# Altium PCB Frequency_Sweeper.PcbDoc
Units mil, origin at the board's own origin, x right, y up, seen from the top; angles counter-clockwise.
Board outline 2720 x 3267.72 mil, 2 copper layers (Top Layer, Bottom Layer); 47 components, 36 nets, 187 pads, 43 vias.
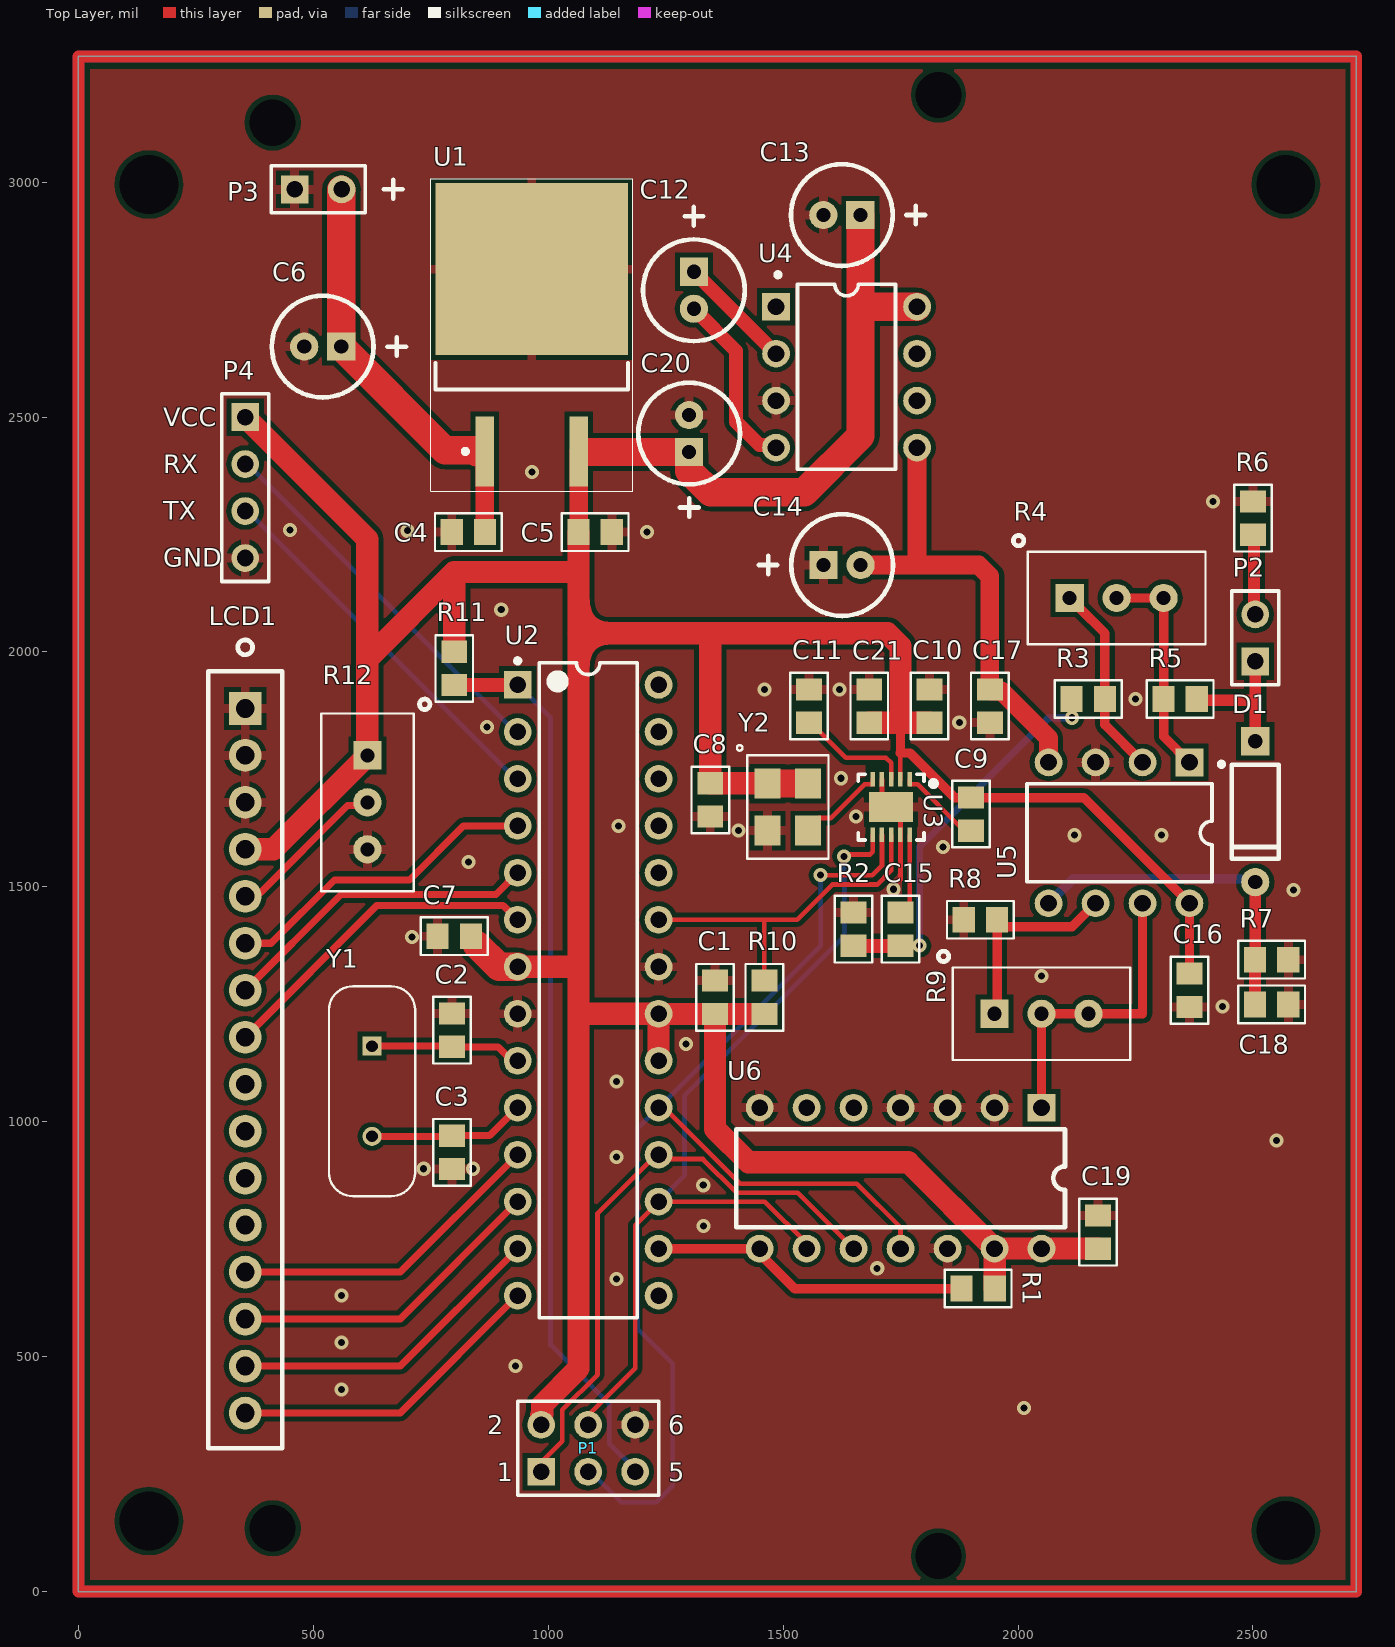
[diagram p0: Top Layer view]
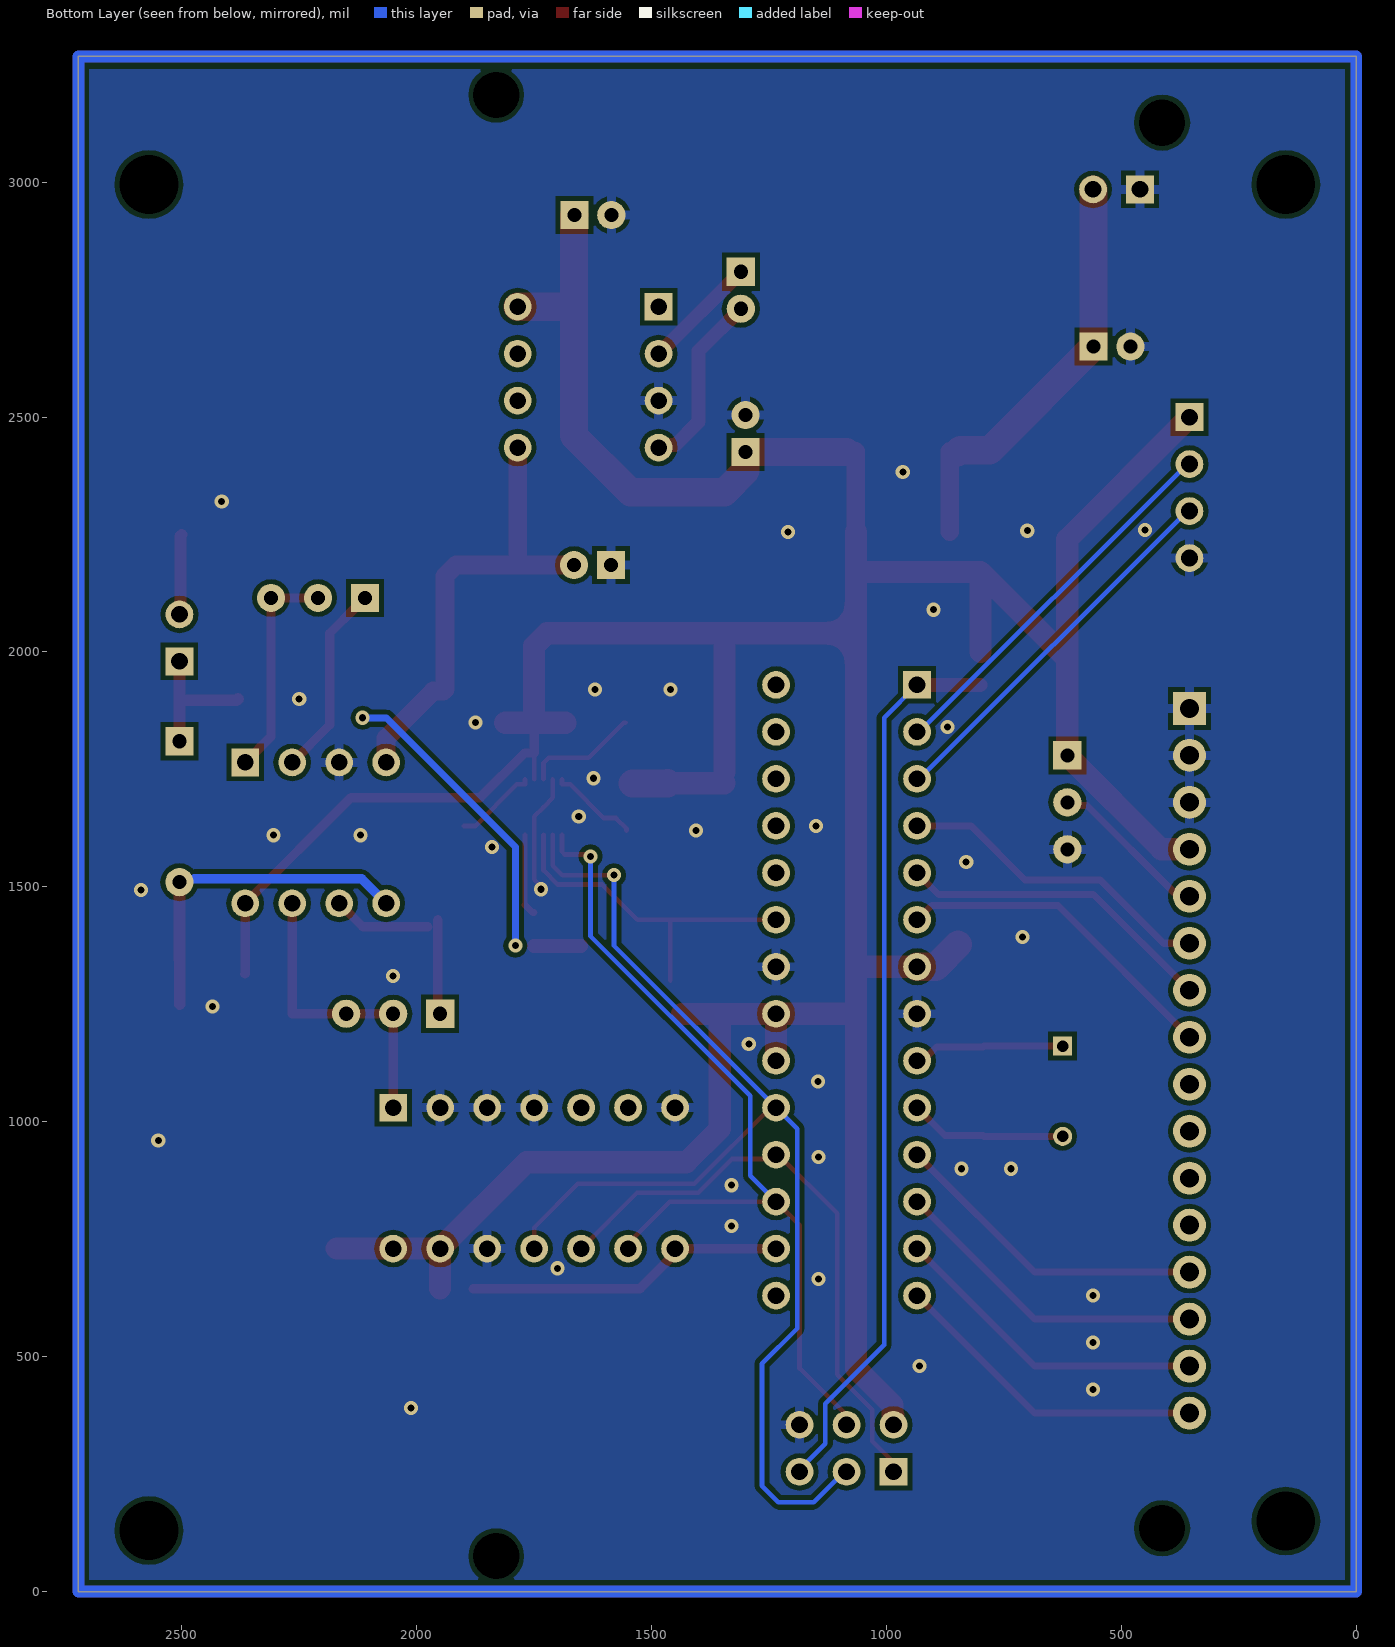
[diagram p1: Bottom Layer view, seen from below]
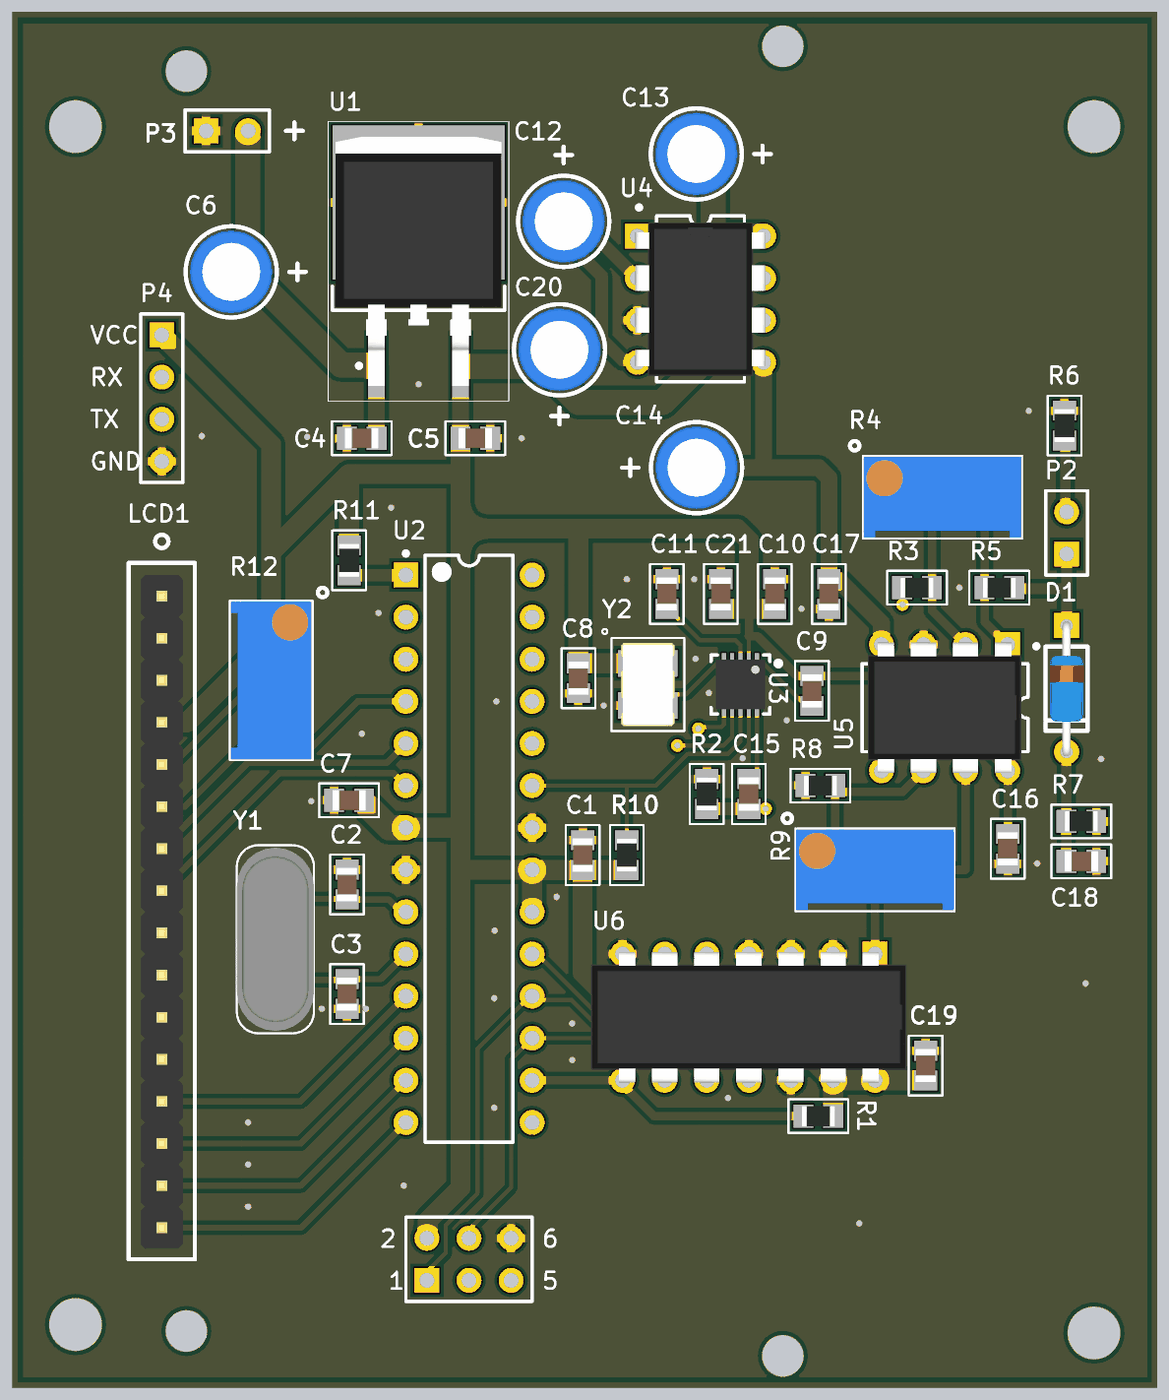
[diagram p2: 3D render of the assembled board from above, using the file's embedded part models]

## Layer stack, top to bottom
Top Solder: solder mask 0.4, Solder Resist, Dk 3.5
Top Layer: signal copper 1.4
Dielectric 1: dielectric 12.6, FR-4, Dk 4.8
Bottom Layer: signal copper 1.4
Bottom Solder: solder mask 0.4, Solder Resist, Dk 3.5

## Board outline
0,0 0,3267.72 2720,3267.72 2720,0

## Design rules (kind name [scope] priority, off if disabled: settings)
Clearance [All] p1: gap=10 ignorepadtopadclearanceinfootprint=TRUE except(0: Arc-Hole Track-Hole SMDPad-Hole THPad-Hole Via-Hole Fill-Hole Poly-Hole Region-Hole Text-Hole; 9: Arc-Arc Arc-Track Arc-SMDPad Track-Track Track-SMDPad)
PlaneConnect [All] p1: pad.planeconnectstyle=Relief pad.reliefexpansion=20 pad.reliefentries=4 pad.reliefconductorwidth=10 pad.reliefairgap=10 via.planeconnectstyle=Direct via.reliefexpansion=20 via.reliefentries=4 via.reliefconductorwidth=10 via.reliefairgap=10
PolygonConnect [All] p1: thpad.connectstyle=Relief thpad.reliefconductorwidth=20 thpad.reliefentries=4 thpad.polygonreliefangle="90 Angle" thpad.airgapwidth=10 smdpad.connectstyle=Relief smdpad.reliefconductorwidth=20 smdpad.reliefentries=4 smdpad.polygonreliefangle="90 Angle" smdpad.airgapwidth=10 via.connectstyle=Direct via.reliefconductorwidth=10 via.reliefentries=4 via.polygonreliefangle="90 Angle" via.airgapwidth=10
RoutingVias [All] p1: holewidth=28 width=50 viastyle="Through Hole" minholewidth=10 minwidth=25 maxholewidth=28 maxwidth=50
SolderMaskExpansion [All] p1: expansion=4 istentingtop=FALSE
Width [All] p1: maxlimit=60 minlimit=10 preferedwidth=15
29 further rules are at their usual default settings.

## Components (designator, comment, footprint, x,y, rotation, side; value= is the part's Value field where it differs from the comment)
C1 "Cap" C0805 1355,1265 r270 top value=0.1uF
C2 "Cap" C0805 795,1195 r270 top value=20pF
C3 "Cap" C0805 795,935 r90 top value=20pF
C4 "Cap" C0805 830,2255 r0 top value=0.33uF
C5 "Cap" C0805 1100,2255 r180 top value=1uF
C6 "Cap Pol1" CAP-D5 520,2650 r180 top value=10uF
C7 "Cap" C0805 800,1395 r0 top value=1uF
C8 "Cap" C0805 1345,1685 r90 top value=0.1uF
C9 "Cap" C0805 1900,1655 r270 top value=10nF
C10 "Cap" C0805 1811.67,1885 r270 top value=0.1uF
C11 "Cap" C0805 1555,1885 r270 top value=0.1uF
C12 "Cap Pol1" CAP-D5 1310,2770 r270 top value=10uF
C13 "Cap Pol1" CAP-D5 1625,2930 r180 top value=10uF
C14 "Cap Pol1" CAP-D5 1625.63,2185 r0 top value=10uF
C15 "Cap" C0805 1750,1410 r90 top value=0.1uF
C16 "Cap" C0805 2365,1280 r90 top value=0.1uF
C17 "Cap" C0805 1940,1885 r270 top value=0.1uF
C18 "Cap" C0805 2540,1250 r180 top value=1uF
C19 "Cap" C0805 2170,765 r270 top value=1uF
C20 "Cap Pol1" CAP-D5 1300,2465 r90 top value=10uF
C21 "Cap" C0805 1683.33,1885 r270 top value=10uF
D1 "1N4148" DIODE-AXIAL-7.62 2505,1810 r270 top
LCD1 "16-Pin LCD Display With Backlight" HEADER-16X1 355,1880 r270 top
P1 "Header 6" HDR2X3 985,255 r0 top
P2 "Header 2" HDR1X2 2505,1980 r90 top
P3 "Header 2" HDR1X2 460.31,2984.69 r0 top
P4 "Header 4" HDR1X4 355,2500 r270 top
R1 "Res1" R0805 1915,645 r0 top value=10K
R2 "Res1" R0805 1650,1410 r270 top value=1K
R3 "Res1" R0805 2149.57,1900 r0 top value=1K
R4 "RPot" TRIMMER-2.54MM 2210,2115 r0 top value=20K
R5 "Res1" R0805 2345,1900 r180 top value=1K
R6 "Res1" R0805 2500,2285 r270 top value=100
R7 "Res1" R0805 2540,1345 r180 top value=100K
R8 "Res1" R0805 1920,1430 r0 top value=1K
R9 "RPot" TRIMMER-2.54MM 2050,1230 r0 top value=20K
R10 "Res1" R0805 1460,1265 r270 top value=10K
R11 "Res1" R0805 800,1965 r90 top value=10K
R12 "RPot" TRIMMER-2.54MM 615,1680 r270 top value=10K
U1 "7805" TO-263_N 965,2675 r90 top
U2 "ATmega168-20PU" 28P3 1085,1280 r0 top
U3 "AD9837" LFCSP-10 1730,1670 r270 top
U4 "LMC7660" DIP-8 1635,2585 r0 top
U5 "TL072P" DIP-8 2215,1615 r270 top
U6 "MCP3004" DIP-14 1750,880 r270 top
Y1 "16MHz" HC-49-THT 625,1065 r270 top
Y2 "LFSPXO051652" LFSPXO051652 1510,1670 r270 top

## Footprints (in the part's own frame and the unit in brackets; to place one, negate y for a bottom-side part, rotate by r counter-clockwise, add the part's x,y. Pads: shape width x height; smd on the part's side, far side on the other; paste and mask are expansions set on the pad)
28P3 [mm] "28-Pin Plastic Dual In-Line Package (PDIP)"
  rect 1.5x1.5 hole 0.9: 1(-3.81,16.51)
  round 1.5 hole 0.9: 2(-3.81,13.97) 3(-3.81,11.43) 4(-3.81,8.89) 5(-3.81,6.35) 6(-3.81,3.81) 7(-3.81,1.27) 8(-3.81,-1.27) 9(-3.81,-3.81) 10(-3.81,-6.35) 11(-3.81,-8.89) 12(-3.81,-11.43) 13(-3.81,-13.97) 14(-3.81,-16.51) 15(3.81,-16.51) 16(3.81,-13.97) 17(3.81,-11.43) 18(3.81,-8.89) 19(3.81,-6.35) 20(3.81,-3.81) 21(3.81,-1.27) 22(3.81,1.27) 23(3.81,3.81) 24(3.81,6.35) 25(3.81,8.89) 26(3.81,11.43) 27(3.81,13.97) 28(3.81,16.51)
  silkscreen extent -3.93,-17.7 2.65,17.93, body extent -3.6,-17.65 3.6,17.65, height 4.58
C0805 [mm] "Chip Resistor, Body 2.0x1.2mm, IPC Medium Density"
  rect 1.2x1.4 smd: 1(-0.9,0) 2(0.9,0)
  silkscreen extent -1.8,-1.02 1.8,1.02, body extent -1,-0.62 1,0.62, height 1.25
CAP-D5 [mil]
  rect 60x60 hole 30: 1(-39.37,0)
  round 60 hole 30: 2(39.37,0)
  silkscreen extent -177,-108 108,108, body extent -98,-98 98,98, height 276
DIODE-AXIAL-7.62 [mil]
  rect 60x60 hole 30: 1(0,0)
  round 60 hole 30: 2(300,0)
  silkscreen extent 50,-50 250,50, body extent -10,-40 310,40, height 99
DIP-8 [mm] "DIP; 8 Leads; Row Spacing 7.62 mm; Pitch 2.54 mm"
  rect 1.5x1.5 hole 0.9: 1(-3.81,3.81)
  round 1.5 hole 0.9: 2(-3.81,1.27) 3(-3.81,-1.27) 4(-3.81,-3.81) 5(3.81,-3.81) 6(3.81,-1.27) 7(3.81,1.27) 8(3.81,3.81)
  silkscreen extent -3.83,-4.98 2.65,5.66, body extent -3.94,-4.63 3.94,4.64, height 3.68
DIP-14 [mm]
  rect 1.5x1.5 hole 0.9: 1(-3.81,7.62)
  round 1.5 hole 0.9: 2(-3.81,5.08) 3(-3.81,2.54) 4(-3.81,0) 5(-3.81,-2.54) 6(-3.81,-5.08) 7(-3.81,-7.62) 8(3.81,-7.62) 9(3.81,-5.08) 10(3.81,-2.54) 11(3.81,0) 12(3.81,2.54) 13(3.81,5.08) 14(3.81,7.62)
  silkscreen extent -2.65,-8.89 2.65,8.89, body extent -3.94,-9.52 3.94,9.53, height 3.68
HC-49-THT [mm]
  rect 1.03x1.03 hole 0.63: 1(-2.44,0)
  round 1.03 hole 0.63: 2(2.44,0)
  silkscreen extent -5.68,-2.33 5.68,2.33, body extent -5.52,-2.32 5.53,2.33, height 4.1
HDR1X2 [mm] "Connector; Header; 2 Position"
  rect 1.5x1.5 hole 0.9: 1(0,0)
  round 1.5 hole 0.9: 2(2.54,0)
  silkscreen extent -1.27,-1.27 3.81,1.27
HDR1X4 [mm] "Connector; Header; 4 Position"
  rect 1.5x1.5 hole 0.9: 1(0,0)
  round 1.5 hole 0.9: 2(2.54,0) 3(5.08,0) 4(7.62,0)
  silkscreen extent -1.27,-1.27 8.89,1.27
HDR2X3 [mm] "Connector; Header; 3x2 Position"
  rect 1.5x1.5 hole 0.9: 1(0,0)
  round 1.5 hole 0.9: 2(0,2.54) 3(2.54,0) 4(2.54,2.54) 5(5.08,0) 6(5.08,2.54)
  silkscreen extent -1.27,-1.27 6.35,3.81
HEADER-16X1 [mil]
  rect 70x70 hole 40: 1(0,0)
  round 70 hole 40: 2(100,0) 3(200,0) 4(300,0) 5(400,0) 6(500,0) 7(600,0) 8(700,0) 9(800,0) 10(900,0) 11(1000,0) 12(1100,0) 13(1200,0) 14(1300,0) 15(1400,0) 16(1500,0)
  silkscreen extent -146,-79 1575,79, body extent -50,-50 1550,50, height 336
LFCSP-10 [mm]
  rect 1.64x2.38 smd paste-2: 0(0,0)
  rect 0.8x0.25 smd: 1(-1.5,1) 2(-1.5,0.5) 3(-1.5,0) 4(-1.5,-0.5) 5(-1.5,-1) 6(1.5,-1) 7(1.5,-0.5) 8(1.5,0) 9(1.5,0.5) 10(1.5,1)
  silkscreen extent -1.78,-1.78 1.78,2.43, body extent -1.5,-1.49 1.5,1.49, height 0.77
LFSPXO051652 [mm]
  rect 1.6x1.4 smd: 1(-1.27,-1.1) 2(1.27,-1.1) 3(1.27,1.1) 4(-1.27,1.1)
  silkscreen extent -3.35,-2.75 2.8,2.2, body extent -2.5,-1.6 2.5,1.6, height 1
R0805 [mm] "Chip Resistor, Body 2.0x1.2mm, IPC Medium Density"
  rect 1.2x1.4 smd: 1(-0.9,0) 2(0.9,0)
  silkscreen extent -1.8,-1.02 1.8,1.02, body extent -1,-0.6 1,0.6, height 0.45
TO-263_N [mm] "D2-PAK, 4-Leads, Body 9.2x10.2mm, Pitch 2.54mm, Lead Span 15.4mm, IPC Medium Density"
  rect 3.8x1 smd: 1(-6.3,2.54) 3(-6.3,-2.54)
  rect 9.3x10.4 smd: 4(3.55,0)
  silkscreen extent -8.45,-5.45 8.45,5.45, body extent -7.5,-5 7.5,5, height 4.42
TRIMMER-2.54MM [mil]
  rect 60x60 hole 30: 1(-100,0)
  round 60 hole 30: 2(0,0) 3(100,0)
  silkscreen extent -220,-98 189,133, body extent -188,-95 188,95, height 435

## Part data
C1: "Capacitor", Supplier Part Number 1=399-1177-1-ND, LatestRevisionDate=17-Jul-2002, LatestRevisionNote="Re-released for DXP Platform.", PackageDescription="Radial Cap, Thru-Hole; 2 Leads; 0.3 in Pin Spacing", PackageReference=RAD-0.3, Published=8-Jun-2000, Publisher="Altium Limited", Supplier 1=Digi-Key
C2 C3: "Capacitor", Supplier Part Number 1=478-3735-1-ND, LatestRevisionDate=17-Jul-2002, LatestRevisionNote="Re-released for DXP Platform.", PackageDescription="Radial Cap, Thru-Hole; 2 Leads; 0.3 in Pin Spacing", PackageReference=RAD-0.3, Published=8-Jun-2000, Publisher="Altium Limited", Supplier 1=Digi-Key
C4 C5 C7 C8 C9 C10 C11 C15 C16 C17 C18 C19 C21: "Capacitor", LatestRevisionDate=17-Jul-2002, LatestRevisionNote="Re-released for DXP Platform.", PackageDescription="Radial Cap, Thru-Hole; 2 Leads; 0.3 in Pin Spacing", PackageReference=RAD-0.3, Published=8-Jun-2000, Publisher="Altium Limited"
C6 C12 C13 C14 C20: "Polarized Capacitor (Radial)", LatestRevisionDate=17-Jul-2002, LatestRevisionNote="Re-released for DXP Platform.", PackageDescription="Polarized Capacitor (Radial); 2 Leads", PackageReference=RB7.6-15, Published=8-Jun-2000, Publisher="Altium Limited"
D1: library part Diode, "Default Diode", Code_JEDEC=DO-214-AB, LatestRevisionDate=17-Jul-2002, LatestRevisionNote="Re-released for DXP Platform.", PackageDescription="DO-214-AB/SMC; 2 C-Bend Leads; Body 7.9 x 5.9 mm, inc. leads (LxW)", PackageReference=SMC, PackageVersion=Sep-1996, Published=8-Jun-2000, Publisher="Altium Limited"
LCD1: library part LCD-16
P1: "Header, 6-Pin", LatestRevisionDate=17-Jul-2002, LatestRevisionNote="Re-released for DXP Platform.", Publisher="Altium Limited"
P2 P3: "Header, 2-Pin", LatestRevisionDate=17-Jul-2002, LatestRevisionNote="Re-released for DXP Platform.", Publisher="Altium Limited"
P4: "Header, 4-Pin", LatestRevisionDate=17-Jul-2002, LatestRevisionNote="Re-released for DXP Platform.", Publisher="Altium Limited"
R1: "Resistor", Supplier Part Number 1=311-10.0KCRCT-ND, LatestRevisionDate=17-Jul-2002, LatestRevisionNote="Re-released for DXP Platform.", PackageDescription="Axial Device, Thru-Hole; 2 Leads; 0.3 in Pin Spacing", PackageReference=AXIAL-0.3, Published=8-Jun-2000, Publisher="Altium Limited", Supplier 1=Digi-Key
R2 R3 R5 R6 R7 R8 R10 R11: "Resistor", LatestRevisionDate=17-Jul-2002, LatestRevisionNote="Re-released for DXP Platform.", PackageDescription="Axial Device, Thru-Hole; 2 Leads; 0.3 in Pin Spacing", PackageReference=AXIAL-0.3, Published=8-Jun-2000, Publisher="Altium Limited"
R4 R9 R12: "Potentiometer", LatestRevisionDate=17-Jul-2002, LatestRevisionNote="Re-released for DXP Platform.", PackageDescription="Variable Resistor, Thru-Hole; 3 Leads", PackageReference=VR5, Published=8-Jun-2000, Publisher="Altium Limited", Set Position=0.5, Sim Note="Enter the Resistance value and the set point into parameter fields."
U1: Supplier Part Number 1=NCV7805BD2TGOS-ND, Supplier 1=Digi-Key
U2: library part CMP-0095-00363-1, "8-bit AVR Microcontroller, 2.7-5.5V, 20MHz, 16KB Flash, 512 Bytes EEPROM, 1KB SRAM, 28-pin PDIP, Industrial Grade (-40°C to 85°C)", ComponentLink1Description="Manufacturer URL", ComponentLink1URL=http://www.atmel.com/, ComponentLink2Description="ATmega48/88/168 Datasheet", ComponentLink2URL=http://www.atmel.com/dyn/resources/prod_documents/doc2545.pdf, ComponentLink3Description="ATmega48/88/168 Summary", ComponentLink3URL=http://www.atmel.com/dyn/resources/prod_documents/2545S.pdf, DatasheetVersion="revT, May-2011", PackageDescription="28-lead (0.300\"/7.62mm Wide) Plastic Dual Inline Package (PDIP)", PackageReference=28P3, PackageVersion="revB, Sep-2001"
U3: "Direct Digital Synthesis IC 10 b 5MHz 28 b Tuning 10-LFCSP-WD (3x3)", Package="LFCSP-10 Analog Devices", Availability=Unavailable, MF="Analog Devices", MP=AD9837, Price=None, SnapEDA_Link=https://www.snapeda.com/parts/AD9837/Analog%20Devices%20Inc./view-part/3230619/?ref=snap
U4: Supplier Part Number 1=LMC7660IMX/NOPBCT-ND, Supplier 1=Digi-Key
U5: "Low-Noise JFET-Input Operational Amplifier", Code_JEDEC=MO-001-AN, ComponentLink1Description="Manufacturer Link", ComponentLink1URL=http://www.ti.com/, ComponentLink2Description=Datasheet, ComponentLink2URL=http://www-s.ti.com/sc/ds/tl072.pdf, DatasheetVersion=Aug-1996, LatestRevisionDate=04-Mar-2005, LatestRevisionNote="Stylized 3D Model Added.", PackageDescription="DIP; 8 Leads; Row Spacing 7.62 mm; Pitch 2.54 mm", PackageReference=P008, PackageVersion=Jun-1999, Published=16-Jan-2001, Publisher="Altium Limited"
U6: "4 Channel ADC SPI"
Y1: library part XTAL, "Crystal Oscillator", Supplier Part Number 1=X1103-ND, LatestRevisionDate=17-Jul-2002, LatestRevisionNote="Re-released for DXP Platform.", PackageDescription="Crystal, Thru-Hole; 2 Leads; Body 3.1 x 8.2 mm (Dia.xH)", PackageReference=R38, Published=8-Jun-2000, Publisher="Altium Limited", Supplier 1=Digi-Key
Y2: library part OSC-4

## Free pads (board coordinates)
  round 60 hole 125: 29(150,150) 29(150,2995) 29(2570,130) 29(2570,2995)
  round 60 hole 98.43: 30(413.39,134.65) 30(413.39,3126.77) 30(1830.71,75.59) 30(1830.71,3185.83)

## Via types
v1: diameter 30, hole 15, Top Layer to Bottom Layer, tented both sides, 39 vias
v2: diameter 30, hole 15, Top Layer to Bottom Layer, 4 vias

## Nets (pads, with @x,y where several pads share a name; then routed paths per layer and width w, separated by ;. In a path a pad name is that pad's centre, name@x,y a point inside that pad or via, vN(x,y) a via of type N, cw(c..) or ccw(c..) an arc to the next point about the centre after c; other vN are vias at no path point)
+5: C1.2 C5.2 C7.2 C8.2 C9.1 C10.2 C13.1 C16.2 C19.2 C20.1 C21.2 LCD1.4 P1.2 P4.1 R1.2 R10.2 R11.2 R12.1 U1.3 U2.7 U2.20 U2.21 U3.2 U4.8 U5.8 U6.13 U6.14 Y2.1 Y2.4 | length 9686.9
  Top Layer w10: 1749.64,1785 1749.64,1729.1 U3.2
  Top Layer w20: 1749.64,1785 1749.96,1785 ; 1749.96,1849.57 1749.96,1785 ; C16.2@2365.71,1314.72 C16.2 U5.8 2140,1690 1900,1690 1865,1690 1770,1785 1749.96,1785
  Top Layer w39.37: C5.2 1065,2255.43 U1.3
  Top Layer w47.24: LCD1.4 415,1580 R12.1 615,1985 ; P4.1 615,2240 615,1985 ; R11.2 800,2170 ; U2.7 1064.57,1330 ; P1.2@985,375 987.26,377.26 987.26,397.26 1064.57,474.57 1064.57,1230 ; C5.2 1064.57,2170 ; U2.20 U2.21 ; C8.2 Y2.1@1466.26,1720.43 ; 1345,1745 1345,2040 ; R10.2@1435,1229.57 C1.2 ; C21.2 1749.96,1849.57 ; C10.2 1750,1849.57 1750,2012.32 1722.32,2040 1345,2040 ; R1.2 1950.43,729.57 U6.13 ; C19.2@2170,730 U6.14 U6.13 ; 615,1985 800,2170 ; 800,2170 1064.57,2170 ; 1064.57,1230 U2.21 ; 1064.57,1230 1064.57,1330 ; 1064.57,1330 1064.57,2040 ; 1064.57,2040 1345,2040 ; 1064.57,2040 1064.57,2170 ; U2.21 1235.43,1229.57 C1.2 ; C1.2 1355,985 1426.3,913.7 1766.3,913.7 U6.13
  Top Layer w60: C7.2@847.5,1377.5 895,1330 U2.7 ; 1085.63,2425.63 C20.1 1300,2385.15 1345.15,2340 1545,2340 1665,2460 1665,2740 ; Y2.1@1466.26,1720.43 Y2.1 Y2.4@1540,1720 ; C13.1 1665,2929.37 1665,2740 ; U4.8 1670,2735 1665,2740
+12: C4.2 C6.1 P3.2 U1.1 | length 888.4
  Top Layer w39.37: C4.2@865,2255.43 U1.1
  Top Layer w60: P3.2 559.37,2983.74 C6.1 780.15,2429.22 843.75,2429.22 U1.1@847.98,2425
-5: C14.2 C17.1 U4.5 U5.4 | length 995.5
  Top Layer w40: C14.2 1785,2185 ; U4.5 1785,2185 ; U5.4 2065,1816.76 1964.95,1916.81 1943.62,1916.81 C17.1 1940,2161.57 1916.57,2185 1785,2185
ADC_CS: R1.1 U2.16 U6.8 | length 686
  Top Layer w20: U2.16 U6.8 1450,719.43 1524.43,645 R1.1
AMP_PEAK: R9.2 R9.3 U5.7 U6.1 | length 635
  Top Layer w20: U6.1@2050,1045 R9.2 R9.3 2265,1230 U5.7
DDS_CS: R10.1 U2.23 U3.8 | length 744
  Top Layer w10: U2.23 1460,1430 ; R10.1 1460,1430 ; U3.8 1729.92,1610.87 1729.92,1534.92 1700,1505 1605,1505 1530,1430 1460,1430
DDS_OUT: C15.2 U3.10 | length 175.4
  Top Layer w10: C15.2@1769.37,1461.56 U3.10
  Top Layer w15: C15.2 1753.25,1445.43 C15.2@1769.37,1461.56
GND: C1.1 C2.1 C3.1 C4.1 C5.1 C6.2 C7.1 C8.1 C10.1 C11.1 C13.2 C14.1 C16.1 C17.2 C18.1 C19.1 C20.2 C21.1 LCD1.1 LCD1.2 LCD1.3 P1.6 P3.1 P4.4 R2.1 R6.1 R7.1 R8.1 R12.3 U1.4 U2.8 U2.22 U3.0 U3.4 U3.9 U4.3 U5.3 U6.2 U6.3 U6.4 U6.7 U6.12 Y2.2 | length 236.7
  Top Layer w10: U3.4 1710.32,1689.68 U3.0 1749.68,1650.32 U3.9 1749.68,1515.32 1745,1510.63
  other v1: 2012.36,390.4 560,430 930,480 560,530 560,630 1145,665 1700.28,688.15 1330.28,778.15 1330,865 735,900 840,900 1145,925 2550,960 1145.74,1085.58 1293.07,1165.81 2435,1245 2050,1310 710.28,1393.15 2586.8,1493.26 1735,1495 830.28,1553.15 1840,1585 2120,1610 2305,1610 1405,1620 1150,1630 1655,1650 1623.37,1731.2 870,1840 1875,1850 2250,1900 1460,1920 1620,1920 900,2090 1210,2255 700.28,2258.15 450,2260 2415,2320 965.28,2383.15
LCD_DB4: LCD1.13 U2.11 | length 689.4
  Top Layer w15: LCD1.13 685,680 925,920 935,920 U2.11
LCD_DB5: LCD1.14 U2.12 | length 683.6
  Top Layer w15: LCD1.14 685,580 U2.12
LCD_DB6: LCD1.15 U2.13 | length 686.5
  Top Layer w15: LCD1.15 685,480 930,725 930,730 U2.13
LCD_DB7: LCD1.16 U2.14 | length 683.6
  Top Layer w15: LCD1.16 685,380 U2.14
LCD_E: LCD1.8 U2.6 | length 708.4
  Top Layer w15: LCD1.8 635,1460 904.19,1460 934.19,1430 U2.6
LCD_R/W: LCD1.7 U2.5 | length 683.6
  Top Layer w15: LCD1.7 559,1484 889,1484 U2.5
LCD_RS: LCD1.6 U2.4 | length 683.6
  Top Layer w15: LCD1.6 410,1380 545,1515 705,1515 820,1630 U2.4
MISO: P1.1 U2.18 U6.10 | length 1259.3
  Top Layer w10: P1.1@985,275 1030,320 1030,386.79 1105,461.79 1105,805 1230,930 U2.18 1244.39,920.61 1329.39,920.61 1401,849 1531,849 U6.10
MOSI: P1.4 U2.17 U3.6 U6.9 | length 1879.5
  Top Layer w10: P1.4@1085,375 1185,475 1185,780 U2.17 1461,830 1550,741 U6.9 ; v2(1630,1565) 1633.83,1568.83 1684.77,1568.83 1690.63,1574.68 U3.6
  Bottom Layer w10: U2.17 1290,885 1290,1055 1630,1395 v2(1630,1565)
NetC2_2: C2.2 U2.9 Y1.1 | length 322.9
  Top Layer w15: Y1.1 793.5,1161.06 C2.2 893.51,1159.57 923.08,1130 U2.9
NetC3_2: C3.2 U2.10 Y1.2 | length 335.3
  Top Layer w15: Y1.2 793.5,968.94 C3.2 875.43,970.43 U2.10
NetC9_2: C9.2 U3.1 | length 178.1
  Top Layer w10: U3.1 1769.37,1718.39 1769.45,1718.31 1786.69,1718.31 1875.43,1629.57 C9.2@1900,1629.57
NetC11_2: C11.2 U3.3 | length 245.3
  Top Layer w10: C11.2 1558.94,1849.57 1633.5,1775 1718.89,1775 1730,1763.89 U3.3
NetC12_1: C12.1 U4.2 | length 247.2
  Top Layer w30: C12.1 1484.37,2635 U4.2
NetC12_2: C12.2 U4.4 | length 385.7
  Top Layer w30: C12.2 1400,2640.63 1400,2490 1449.44,2440.56 1479.44,2440.56 U4.4
NetC15_1: C15.1 R2.2 R3.1 | length 748.9
  Top Layer w30: R2.2 C15.1
  Bottom Layer w15: v2(1790,1375) 1790,1585 2064.24,1859.24 2114.24,1859.24 v2(2115,1860)
NetC18_2: C18.2 D1.2 R7.2 U5.5 | length 699.4
  Top Layer w25: C18.2 R7.2 2504.78,1345.22 2504.78,1509.78 D1.2
  Bottom Layer w20: U5.5 2117.03,1517.03 2473.22,1517.03
  Bottom Layer w25: D1.2@2498.3,1516.7 D1.2
NetD1_1: D1.1 P2.1 R5.1 | length 295.6
  Top Layer w25: R5.1 2382.96,1897.47 2505,1897.47 ; D1.1 2505,1897.47 ; P2.1 2505,1897.47
NetLCD1_3: LCD1.5 R12.2 | length 342.8
  Top Layer w15: LCD1.5 363.61,1488.61 388.61,1488.61 572.88,1672.88 607.88,1672.88 R12.2
NetP2_2: P2.2 R6.2 | length 171.6
  Top Layer w25: R6.2 2502.5,2247.07 2502.5,2082.5 P2.2
NetR3_2: R3.2 R4.1 U5.2 | length 428.3
  Top Layer w20: R4.1@2100,2125 2130,2095 2185,2040 2185,1845 U5.2
NetR4_2: R4.2 R4.3 R5.2 U5.1 | length 472.8
  Top Layer w20: R4.2 2289.78,2115 2290,2115 R4.3 2310,1820 U5.1
NetR8_2: R8.2 R9.1 U5.6 | length 415.9
  Top Layer w15: R9.1 R9.1@1960.43,1240.43
  Top Layer w20: R8.2 1955.43,1245.43 R9.1@1960.43,1240.43 ; R8.2@1976.18,1415 2115,1415 U5.6
NetU3_5: U3.5 Y2.3 | length 191.1
  Top Layer w10: Y2.3 1553.31,1623.94 1575.87,1646.5 1601.5,1646.5 1673.31,1718.31 1690.55,1718.31 1690.63,1718.39 U3.5
RESET: P1.5 R11.1 U2.1 | length 1913.7
  Top Layer w30: R11.1 800.22,1929.78 934.78,1929.78 U2.1
  Bottom Layer w10: U2.1 1005,1860 1005,525 1130,400 1130,315 1185,260 P1.5
RX: P4.2 U2.2 | length 816.1
  Bottom Layer w10: P4.2@360,2400 U2.2@930,1830
  Bottom Layer w30: P4.2 P4.2@360,2400 ; U2.2@930,1830 U2.2
SCLK: P1.3 U2.19 U3.7 U6.11 | length 2584
  Top Layer w10: U2.19 1246.87,1030 1408.87,868 1657,868 1750,775 U6.11 ; v2(1580,1525) 1690,1525 1710.32,1545.32 U3.7
  Bottom Layer w10: P1.3 1090,255 1155,190 1230,190 1265,225 1265,485 1190,560 1190,985 U2.19 1580,1375 v2(1580,1525)
TX: P4.3 U2.3 | length 816.1
  Bottom Layer w10: P4.3@360,2300 U2.3@930,1730
  Bottom Layer w30: P4.3 P4.3@360,2300 ; U2.3@930,1730 U2.3
pads on no net: LCD1.9 LCD1.10 LCD1.11 LCD1.12 U2.15 U2.24 U2.25 U2.26 U2.27 U2.28 U4.1 U4.6 U4.7 U6.5 U6.6

## Polygon pours and split planes (outlines as drawn)
GND on Top Layer "GND_L01_P002" (solid, remove dead copper, pour order 2): 25,3240 25,25 2701.81,25 2701.81,3240
GND on Bottom Layer "GND_L02_P001" (solid, remove dead copper, pour order 1): 25,3240 25,25 2700,25 2700,3240

## Other copper
Multi-Layer:
  the board outline again, w25

## Silkscreen, mask and mechanical layers (free items; w line width, h text height)
Top Overlay:
  lines w10: 650,2985 690,2985 ; 670,2965 670,3005
  text "VCC" at 180.98,2480.98 h40
  text "RX" at 180.98,2380.98 h40
  text "TX" at 180.98,2280.98 h40
  text "GND" at 180.98,2180.98 h40

## Text inside footprints (layer, text, board x,y; h text height)
P1: Top Overlay "1" at 890,235 h40; Top Overlay "2" at 870,335 h40; Top Overlay "5" at 1255,235 h40; Top Overlay "6" at 1255,335 h40